# Altium PCB STM32_EVAL.PcbDoc
Units mm, origin at the board's own origin, x right, y up, seen from the top; angles counter-clockwise.
Board outline 152.4 x 101.6 mm, 6 copper layers (Top Layer 1, Layer 1, Top Layer, Bottom Layer, Layer 2, Bottom Layer 1), stack 0.816 mm thick; 88 components, 93 nets, 337 pads, 13 vias.
Unrouted connection lines stored in the file: 181.
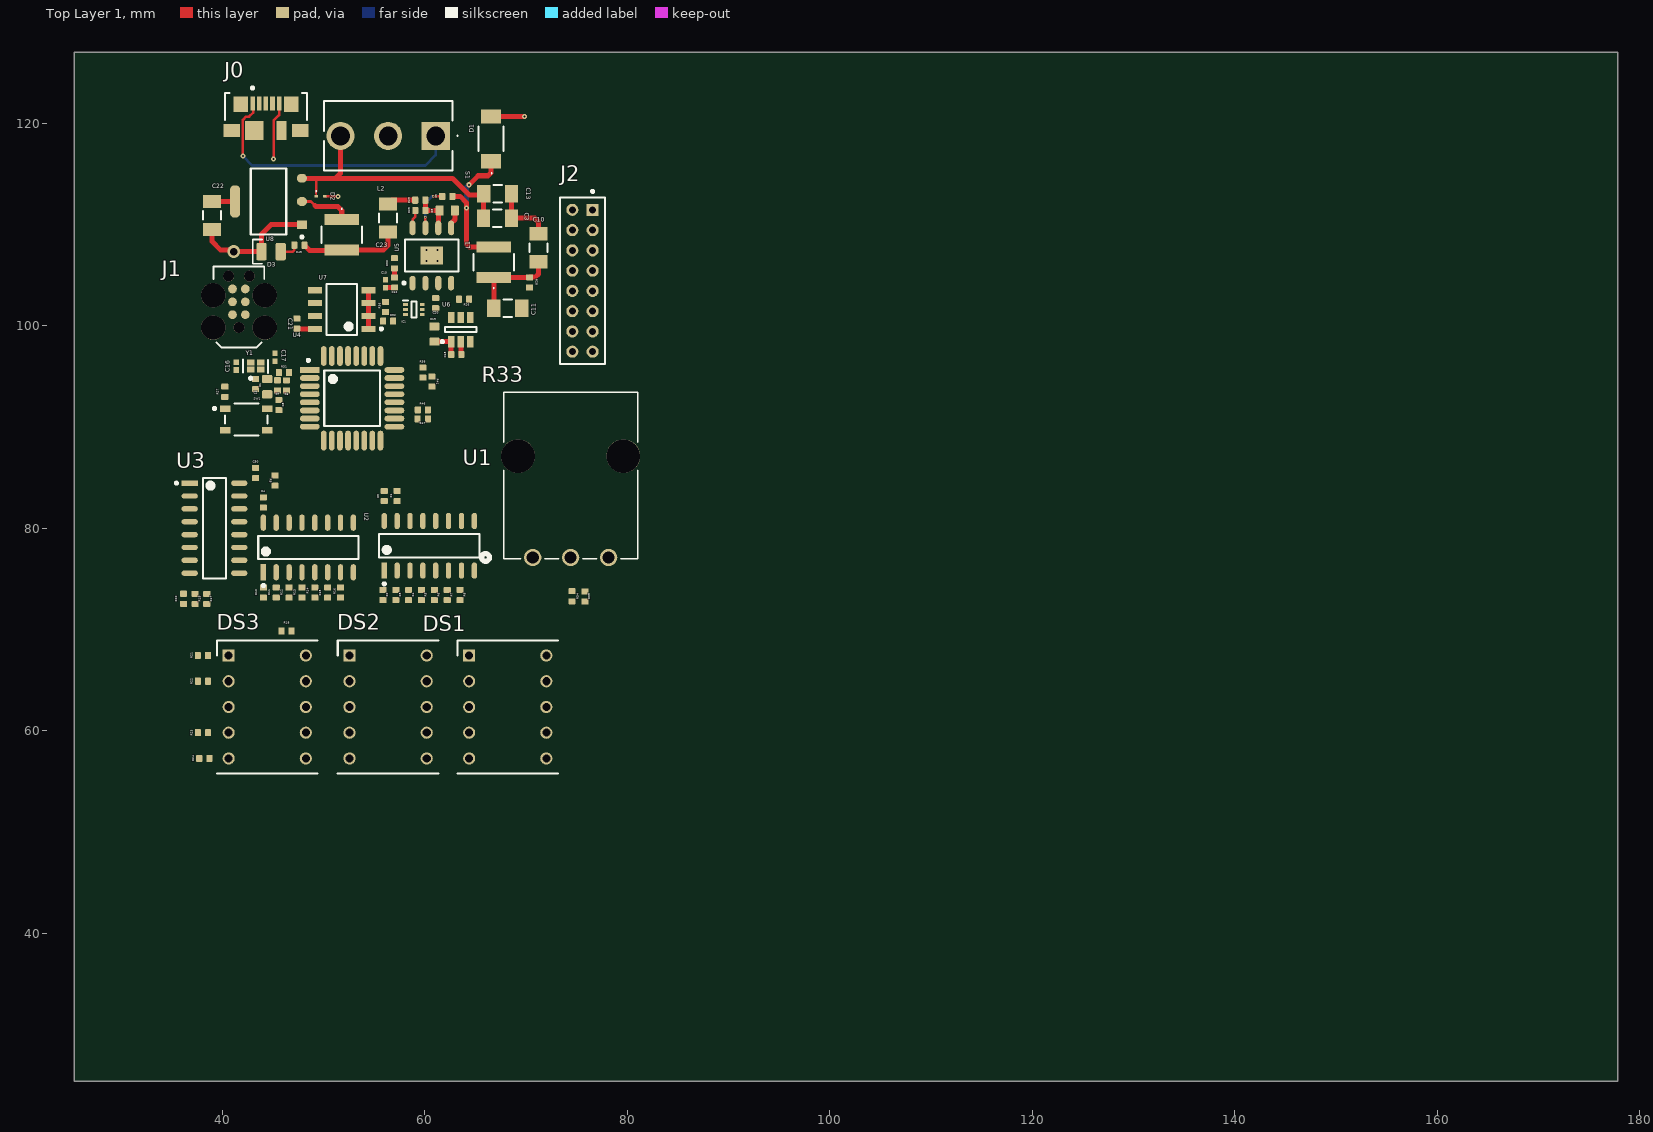
[diagram p0: Top Layer 1 view]
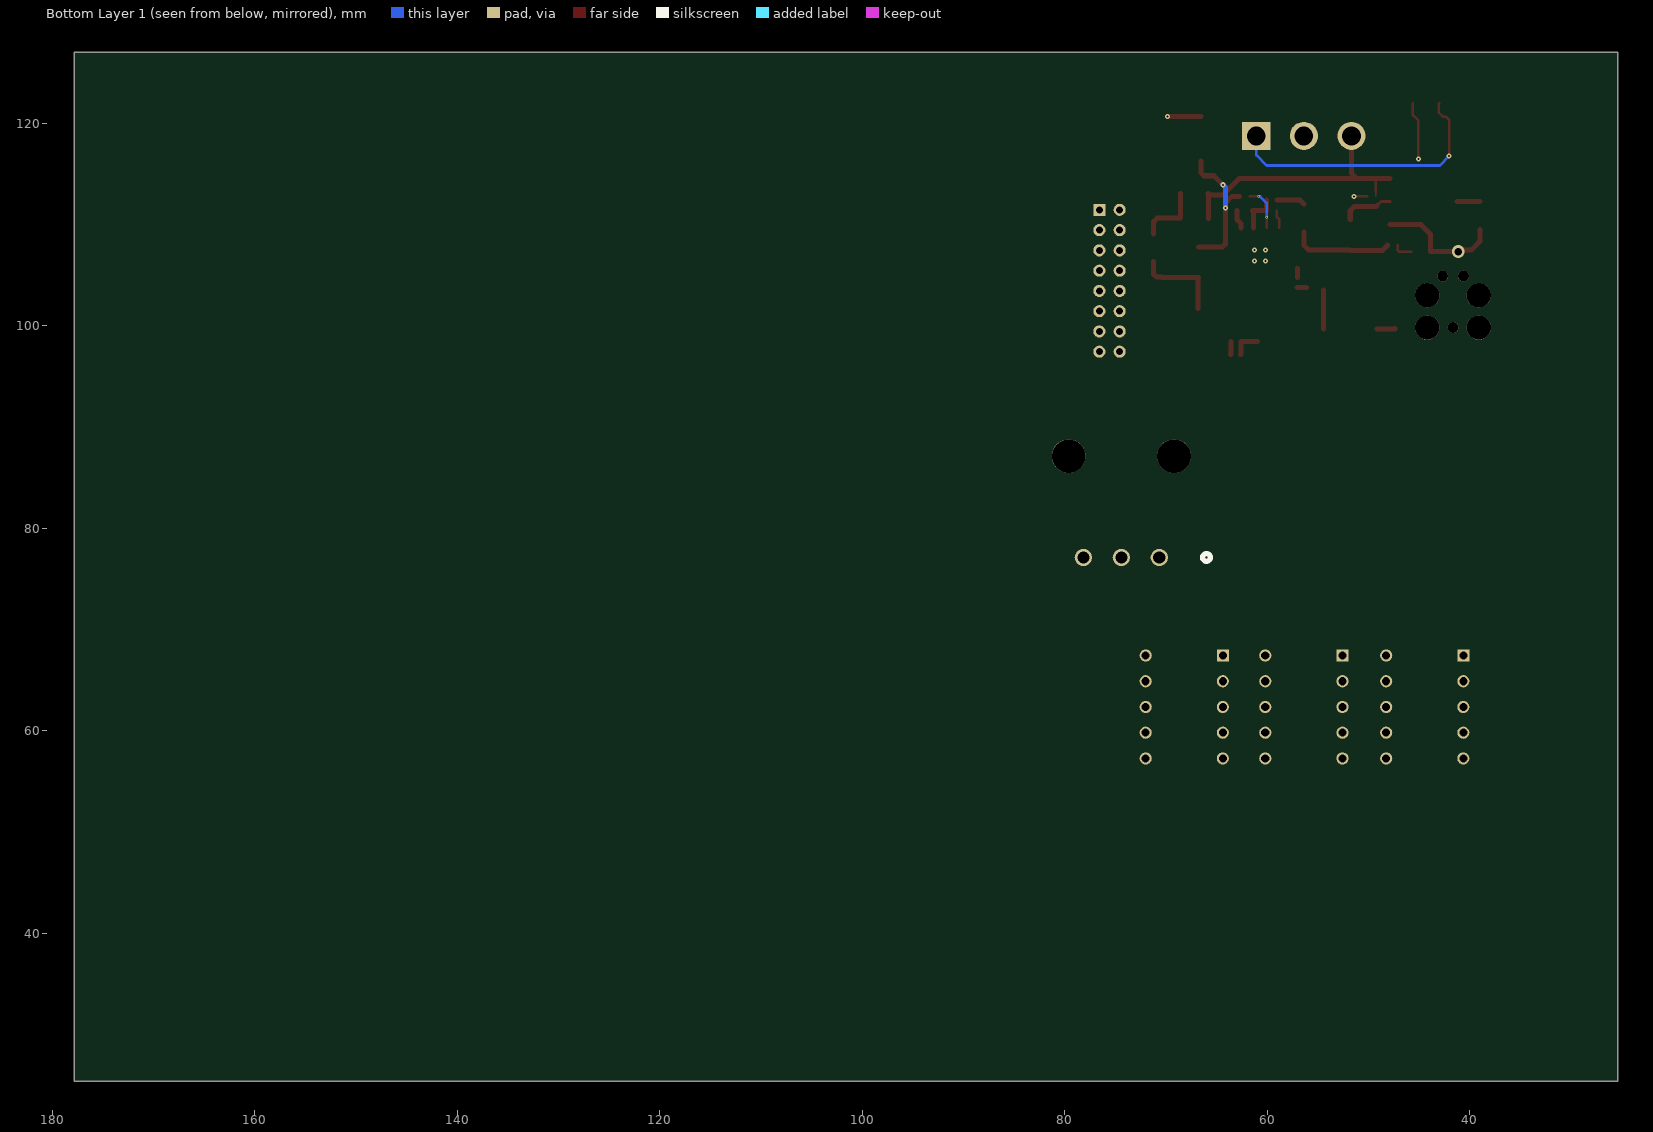
[diagram p1: Bottom Layer 1 view, seen from below]

## Layer stack, top to bottom
Top Solder: solder mask 0.0102, Solder Resist, Dk 3.5
Top Layer 1: signal copper 0.035
Dielectric 2: prepreg 0.0711, PP-006, Dk 4.1
Layer 1: signal copper 0.035
Dielectric 3: prepreg 0.0711, PP-006, Dk 4.1
Top Layer: signal copper 0.0356
Dielectric 1: dielectric 0.32, FR-4, Dk 4.8
Bottom Layer: signal copper 0.0356
Dielectric 4: prepreg 0.0711, PP-006, Dk 4.1
Layer 2: signal copper 0.035
Dielectric 5: prepreg 0.0711, PP-006, Dk 4.1
Bottom Layer 1: signal copper 0.035
Bottom Solder: solder mask 0.0102, Solder Resist, Dk 3.5

## Board outline
25.4,25.4 177.8,25.4 177.8,127 25.4,127

## Design rules (kind name [scope] priority, off if disabled: settings)
Clearance [All] p1: gap=0.102 ignorepadtopadclearanceinfootprint=TRUE except(0.152: SMDPad-SMDPad; 0.203: Arc-Via Track-Via SMDPad-Via THPad-Via Via-Via; 0.254: Arc-THPad Track-THPad SMDPad-THPad THPad-THPad)
Height [All] p1: minheight=0 maxheight=127 prefheight=12.7
HoleSize [All] p1: absolutevalues=TRUE maxlimit=50.8 minlimit=0.025 maxpercent=80.000 minpercent=20.000
HoleToHoleClearance [All] p1: gap=0.203 allowstackedmicrovias=TRUE
MinimumSolderMaskSliver [All] p1: minsoldermaskwidth=0.102
PasteMaskExpansion [All] p1: expansion=0.003
PolygonConnect [All] p1: connectstyle=Relief reliefconductorwidth=0.254 reliefentries=4 polygonreliefangle="90 Angle" airgapwidth=0.254
RoutingVias [All] p1: holewidth=0.152 width=0.254 viastyle="Through Hole" minholewidth=0.152 minwidth=0.254 maxholewidth=0.711 maxwidth=0.762
SilkToSilkClearance [All] p1: silktosilkclearance=0.102
SilkToSolderMaskClearance [IsPad] p1: minsilkscreentomaskgap=0.102 clearancetoexposedcopper=TRUE
SolderMaskExpansion [All] p1: expansion=0.004 istentingtop=FALSE
SupplyNets "Schematic Supply Nets_2" [InNet('GND')] p1: voltage=0.000
SupplyNets "Schematic Supply Nets_1" [InNet('+3V3')] p2: voltage=0.000
SupplyNets "Schematic Supply Nets" [InNet('5V_PTC')] p3: voltage=0.000
Width [All] p1: maxlimit=0.508 minlimit=0.102 preferedwidth=0.254 toplayer_prefwidth=0.127 midlayer1_minwidth=0.254 midlayer1_maxwidth=0.254 midlayer2_minwidth=0.254 midlayer2_maxwidth=0.254 midlayer3_minwidth=0.254 midlayer3_maxwidth=0.254 midlayer4_minwidth=0.254 midlayer4_maxwidth=0.254 bottomlayer_prefwidth=0.127 minimp=50.000000 maximp=50.000000 favimp=50.000000
23 further rules are at their usual default settings.

## Classes and differential pairs
component class S1: C3 C4 C50 DS1 DS2 DS3 R1 R2 R3 R4 R5 R6 R7 R8 R9 R10 R11 R12 R13 R14 R15 R16 R17 R18 R19 R20 R21 R22 R23 R24 U1 U2 U3
component class MCU_Build: C1 C2 C3 C5 C6 C7 C8 C9 C10 C11 C12 C13 C15 C16 C17 C18 C19 C20 C21 C22 C23 D1 D2 D3 IC1 J0 J1 J2 L1 L2 R25 R26 R27 R28 R29 R30 R31 R32 R33 R34 R35 R36 R38 R41 R45 R46 R47 S1 SW1 U4 U5 U6 U7 U8 Y1

## Components (designator, comment, footprint, x,y, rotation, side; value= is the part's Value field where it differs from the comment)
C1 "2.2u" CAP_0603 44.45,93.98 r90 top
C2 "100n" CAP_0402 43.307,94.234 r90 top
C3 "10u" FP-CL31-IPC_B 67.183,110.617 r0 top (schematic designator C14)
C3 "100n" CAP_0402 56.007,83.185 r90 top
C4 "100n" CAP_0402 44.069,82.55 r90 top
C5 "100n" CAP_0402 62.23,112.776 r0 top
C6 "100n" CAP_0402 46.355,94.107 r90 top
C7 "100n" CAP_0402 45.466,94.115 r90 top
C8 "100n" CAP_0402 45.594,92.165 r270 top
C9 "2.2u" CAP_0603 62.23,111.379 r180 top
C10 "10u" FP-CL31-IPC_B 71.247,107.696 r90 top
C11 "10u" FP-CL31-IPC_B 68.199,101.727 r0 top
C12 "100n" CAP_0402 57.023,104.267 r270 top
C13 "10u" FP-CL31-IPC_B 67.204,113.03 r0 top
C15 "8p" CAPC1005X55X25LL05T10 56.134,104.149 r270 top
C16 "8p" CAPC1005X55X25LL05T10 41.402,96.012 r270 top
C17 "8p" CAPC1005X55X25LL05T10 45.212,96.892 r270 top
C18 "100n" CAP_0402 63.119,97.155 r180 top
C19 "2.2u" CAP_0603 60.96,99.175 r270 top
C20 "100n" CAP_0402 61.087,102.227 r270 top
C21 "100n" CAP_0402 47.371,100.203 r270 top
C22 "2.2u" FP-CL31-IPC_B 38.989,110.892 r270 top
C23 "2.2u" FP-CL31-IPC_B 56.388,110.638 r90 top
C50 "100n" CAP_0402 43.307,85.463 r90 top
D1 "RBR5LAM60A" RF071LAM4S 66.548,118.45 r180 top
D2 "ESD9X5.0ST5G" ONSC-SOD-923-2-514AA-01_V 49.696,112.776 r0 top
D3 "GREEN" LED_0805_GREEN 44.831,107.315 r0 top
DS1 "LTS-4301JR" DIPS762W50P254L1290H725Q10N 64.389,67.437 r0 top
DS2 "LTS-4301JR" DIPS762W50P254L1290H725Q10N 52.578,67.437 r0 top
DS3 "LTS-4301JR" DIPS762W50P254L1290H725Q10N 40.64,67.437 r0 top
IC1 "TMP1075NDRLR" SOTFL50P160X60-6N 58.928,101.6 r0 top
J0 "473460001" FP-473460001-MFG 44.323,119.634 r0 top
J1 "TC2030" TC2030-FP 41.656,102.362 r90 top
J2 "79107-7007" FP-79107-7007-MFG 75.581,104.441 r270 top
L1 "15u" ASPI-4030S 66.802,106.275 r90 top
L2 "15u" ASPI-4030S 51.816,108.99 r270 top
R1 "330R" RES_0402 57.277,83.185 r270 top
R2 "330R" RES_0402 55.88,73.414 r90 top
R3 "330R" RES_0402 57.15,73.414 r90 top
R4 "330R" RES_0402 58.42,73.406 r90 top
R5 "330R" RES_0402 59.69,73.414 r90 top
R6 "330R" RES_0402 60.96,73.406 r90 top
R7 "330R" RES_0402 62.23,73.414 r90 top
R8 "330R" RES_0402 63.5,73.414 r90 top
R9 "330R" RES_0402 45.212,84.709 r270 top
R10 "330R" RES_0402 44.069,73.652 r270 top
R11 "330R" RES_0402 45.339,73.66 r270 top
R12 "330R" RES_0402 46.609,73.652 r90 top
R13 "330R" RES_0402 47.879,73.66 r270 top
R14 "330R" RES_0402 49.149,73.652 r90 top
R15 "330R" RES_0402 50.419,73.652 r270 top
R16 "330R" RES_0402 51.689,73.66 r270 top
R17 "330R" RES_0402 38.481,73.025 r90 top
R18 "330R" RES_0402 46.355,69.85 r180 top
R19 "330R" RES_0402 37.338,73.025 r90 top
R20 "330R" RES_0402 36.195,73.033 r270 top
R21 "330R" RES_0402 38.1,67.437 r0 top
R22 "330R" RES_0402 38.1,64.897 r180 top
R23 "330R" RES_0402 38.1,59.817 r180 top
R24 "330R" RES_0402 38.235,57.277 r180 top
R25 "120K" RES_0402 59.571,111.379 r180 top
R26 "10k" RES_0402 63.889,102.616 r0 top
R27 "10K" RES_0402 40.259,93.48 r90 top
R28 "100k" RES_0402 70.358,104.275 r90 top
R29 "80K" RES_0402 59.563,112.395 r0 top
R30 "4.7K" RES_0402 57.023,106.172 r270 top
R31 "0R" RES_0402 46.101,95.377 r0 top
R32 "10K" RES_0402 56.388,100.457 r0 top
R33 "P120PK-Y25BR10K" POT_P120PK-x25_TTE 70.665,77.122 r0 top
R34 "1k" RES_0402 74.549,73.287 r90 top
R35 "100k" RES_0402 75.819,73.271 r90 top
R36 "4.7k" RES_0402 56.134,101.854 r270 top
R38 "4.7k" RES_0402 59.817,95.369 r270 top
R41 "4.7k" RES_0402 60.706,94.48 r270 top
R45 "1k" RES_0402 47.625,107.95 r180 top
R46 "0R" RES_0402 59.817,91.694 r0 top
R47 "0R" RES_0402 59.809,90.805 r180 top
S1 "ANT11SF1CQE" ANT11SF1CQE 61.089,118.745 r90 top
SW1 "PTS810SJM250SMTRLFS" FP-PTS810SJM250SMTRLFS-MFG 42.389,90.744 r0 top
U1 "74HC595D,118" FP-SOT109-1-IPC_C 60.452,78.27 r90 top
U2 "74HC595D,118" FP-SOT109-1-IPC_C 48.514,78.105 r90 top
U3 "74HC595D,118" FP-SOT109-1-IPC_C 39.243,80.01 r0 top
U4 "STM32G030K8T6" FP-LQFP32-5V-IPC_A 52.832,92.837 r0 top
U5 "BD9G401EFJ-E2" SOIC127P600X100_HS-9N 60.706,106.934 r90 top
U6 "MCP4013T-502E/CH" SOT-23-CH6_N 63.566,99.625 r90 top
U7 "M24C02-WMN6TP" FP-SO8N-SO-A-MFG 51.816,101.6 r180 top
U8 "AMS1117-3.3" FP-AMS1117-IPC_C 44.577,112.268 r180 top
Y1 "ABM12W-40.0000MHZ-6-B1U-T3" FP-ABM12W-MFG 43.307,96.012 r0 top

## Footprints (in the part's own frame and the unit in brackets; to place one, negate y for a bottom-side part, rotate by r counter-clockwise, add the part's x,y. Pads: shape width x height; smd on the part's side, far side on the other; paste and mask are expansions set on the pad)
ANT11SF1CQE [mm]
  rect 2.775x2.775 hole 1.85: 1(0,0)
  round 2.775 hole 1.85: 2(0,4.7) 3(0,9.4)
  silkscreen extent -3.43,-2.2 3.43,11.05, body extent -3.43,-1.65 3.43,11.05, height 29.5
ASPI-4030S [mm]
  rect 1.1x3.4 smd: 1(-1.5,0) 2(1.5,0)
  silkscreen extent -2.6,-2 0.8,2, body extent -2,-2 2,2, height 3
CAP_0402 [mm]
  rrect25% 0.6x0.7 smd: 1(-0.5,0) 2(0.5,0)
  body extent -0.5,-0.26 0.5,0.26, height 0.37
CAP_0603 [mm]
  rrect25% 0.8x1 smd: 1(-0.75,0) 2(0.75,0)
  body extent -0.8,-0.4 0.8,0.4, height 0.51
CAPC1005X55X25LL05T10 [mm] "Chip Capacitor, 2-Leads, Body 1.00x0.50mm, IPC High Density"
  rect 0.56x0.52 smd: 1(-0.39,0) 2(0.39,0)
  body extent -0.53,-0.28 0.53,0.28, height 0.55
DIPS762W50P254L1290H725Q10N [mm]
  rect 1.2x1.2 hole 0.8: 1(0,0)
  round 1.2 hole 0.8: 2(0,-2.54) 3(0,-5.08) 4(0,-7.62) 5(0,-10.16) 6(7.62,-10.16) 7(7.62,-7.62) 8(7.62,-5.08) 9(7.62,-2.54) 10(7.62,0)
  silkscreen extent -1.16,-11.66 8.78,1.5, body extent -1.03,-11.53 8.67,1.37, height 8
FP-79107-7007-MFG [mm]
  rect 1.2x1.2 hole 0.7 paste-2539.97 mask+0: A1(-7,1)
  round 1.2 hole 0.7 paste-2539.97 mask+0: A2(-5,1) A3(-3,1) A4(-1,1) A5(1,1) A6(3,1) A7(5,1) A8(7,1) B1(-7,-1) B2(-5,-1) B3(-3,-1) B4(-1,-1) B5(1,-1) B6(3,-1) B7(5,-1) B8(7,-1)
  silkscreen extent -8.94,-2.22 8.22,2.22, body extent -8.32,-2.32 8.32,2.32, height 0.25
FP-473460001-MFG [mm]
  rect 0.45x1.38 smd paste+0 mask+0: 1(-1.3,2.31) 2(-0.65,2.31) 3(0,2.31) 4(0.65,2.31) 5(1.3,2.31)
  rect 1.425x1.55 smd paste+0 mask+0: 6(-2.488,2.225) 7(2.488,2.225)
  rect 1.65x1.3 smd paste+0 mask+0: 8(-3.375,-0.35) 11(3.375,-0.35)
  rect 1.8x1.9 smd paste+0 mask+0: 9(-1.15,-0.35)
  rect 1x1.9 smd paste+0 mask+0: 10(1.55,-0.35)
  silkscreen extent -4.05,0.67 4.05,3.97, body extent -4.3,-2.48 4.3,3.45, height 0.25
FP-ABM12W-MFG [mm]
  rect 0.73x0.58 smd paste+0 mask+0: 1(-0.5,-0.35) 2(0.5,-0.35) 3(0.5,0.35) 4(-0.5,0.35)
  silkscreen extent -1.25,-1.32 1.23,0.67, body extent -0.96,-0.75 0.96,0.75, height 0.25
FP-AMS1117-IPC_C [mm]
  rect 1.004x0.872 smd paste+0 mask+0: 1(-3.295,2.29)
  rrect100% 1.004x0.872 smd paste+0 mask+0: 2(-3.295,0) 3(-3.295,-2.29)
  rrect87% 1.004x3.182 smd paste+0 mask+0: 4(3.295,0)
  silkscreen extent -3.42,-3.25 1.75,3.62, body extent -3.9,-3.35 3.9,3.35, height 0.25
FP-CL31-IPC_B [mm]
  rect 1.305x1.758 smd paste+0 mask+0: 1(-1.376,0) 2(1.376,0)
  silkscreen extent -0.42,-0.88 0.42,0.88, body extent -1.6,-0.8 1.6,0.8, height 1.4
FP-LQFP32-5V-IPC_A [mm]
  rect 1.955x0.566 smd paste+0 mask+0: 1(-4.175,2.8)
  rrect100% 1.955x0.566 smd paste+0 mask+0: 2(-4.175,2) 3(-4.175,1.2) 4(-4.175,0.4) 5(-4.175,-0.4) 6(-4.175,-1.2) 7(-4.175,-2) 8(-4.175,-2.8) 17(4.175,-2.8) 18(4.175,-2) 19(4.175,-1.2) 20(4.175,-0.4) 21(4.175,0.4) 22(4.175,1.2) 23(4.175,2) 24(4.175,2.8)
  rrect100% 0.566x1.955 smd paste+0 mask+0: 9(-2.8,-4.175) 10(-2,-4.175) 11(-1.2,-4.175) 12(-0.4,-4.175) 13(0.4,-4.175) 14(1.2,-4.175) 15(2,-4.175) 16(2.8,-4.175) 25(2.8,4.175) 26(2,4.175) 27(1.2,4.175) 28(0.4,4.175) 29(-0.4,4.175) 30(-1.2,4.175) 31(-2,4.175) 32(-2.8,4.175)
  silkscreen extent -4.45,-2.75 2.75,3.87, body extent -5.65,-5.65 5.65,5.65, height 0.25
FP-PTS810SJM250SMTRLFS-MFG [mm]
  rect 1.05x0.65 smd paste+0 mask+0: 1(-2.075,1.075) 2(2.075,1.075) 3(-2.075,-1.075) 4(2.075,-1.075)
  silkscreen extent -3.27,-1.6 2.1,1.6, body extent -2.7,-1.7 2.7,1.7, height 0.25
FP-SO8N-SO-A-MFG [mm]
  rect 1.4x0.6 smd paste+0 mask+0: 1(-2.65,1.905) 2(-2.65,0.635) 3(-2.65,-0.635) 4(-2.65,-1.905) 5(2.65,-1.905) 6(2.65,-0.635) 7(2.65,0.635) 8(2.65,1.905)
  silkscreen extent -4.03,-2.5 1.5,2.5, body extent -3.45,-2.6 3.45,2.6, height 0.25
FP-SOT109-1-IPC_C [mm]
  rect 1.604x0.528 smd paste+0 mask+0: 1(-2.451,4.445)
  rrect100% 1.604x0.528 smd paste+0 mask+0: 2(-2.451,3.175) 3(-2.451,1.905) 4(-2.451,0.635) 5(-2.451,-0.635) 6(-2.451,-1.905) 7(-2.451,-3.175) 8(-2.451,-4.445) 9(2.451,-4.445) 10(2.451,-3.175) 11(2.451,-1.905) 12(2.451,-0.635) 13(2.451,0.635) 14(2.451,1.905) 15(2.451,3.175) 16(2.451,4.445)
  silkscreen extent -3.88,-4.95 1.15,4.95, body extent -3.35,-5.05 3.35,5.05, height 0.25
LED_0805_GREEN [mm]
  rrect25% 1x1.7 smd: A(0.95,0) K(-0.95,0)
  silkscreen extent -1.8,-1.2 -0.9,1.2, body extent -1,-0.63 1,0.63, height 1.12
ONSC-SOD-923-2-514AA-01_V [mm] "SOD, 2-Leads, Body 0.8x0.6mm"
  rect 0.36x0.25 smd: 1(-0.42,0) 2(0.42,0)
  silkscreen extent -0.47,0.48 -0.37,0.57, body extent -0.4,-0.3 0.4,0.3, height 0.43
POT_P120PK-x25_TTE [mil]
  round 67 / inner round 60 / far side round 67 hole 47 paste-99999 mask+0: 1(0,0) 2(147.64,0) 3(295.28,0)
  round 131 / inner round 60 / far side round 131 hole 131 unplated paste-99999 mask+0: 4(-57.09,393.7) 5(352.36,393.7)
  silkscreen extent -198,-15 409,643
RES_0402 [mm]
  rrect25% 0.6x0.7 smd: 1(-0.5,0) 2(0.5,0)
  body extent -0.5,-0.25 0.5,0.25, height 0.3
RF071LAM4S [mm]
  rect 2x1.4 smd: 1(0,2.2) 2(0,-2.2)
  silkscreen extent -1.25,-1.2 1.25,3.45, body extent -1.25,-2.35 1.25,2.35, height 0.95
SOIC127P600X100_HS-9N [mm] "SOIC, 8-Leads, Body 5.03x3.90mm, Pitch 1.27mm, Thermal Pad 2.20x1.80mm, IPC Medium Density"
  oval 1.45x0.6 smd: 1(-2.725,1.905) 2(-2.725,0.635) 3(-2.725,-0.635) 4(-2.725,-1.905) 5(2.725,-1.905) 6(2.725,-0.635) 7(2.725,0.635) 8(2.725,1.905)
  rect 1.8x2.2 smd: 2(0,0)
  silkscreen extent -2.85,-2.65 1.6,2.88, body extent -3,-2.65 3,2.65, height 1
SOT-23-CH6_N [mm] "SOT23, 6-Leads, Body 2.9x1.7mm, Pitch 0.95mm, Lead Span 2.8mm, IPC Medium Density"
  rect 1.1x0.65 smd: 1(-1.2,0.95) 2(-1.2,0) 3(-1.2,-0.95) 4(1.2,-0.95) 5(1.2,0) 6(1.2,0.95)
  silkscreen extent -1.32,-1.55 0.25,1.95, body extent -0.9,-1.55 0.9,1.55, height 1.45
SOTFL50P160X60-6N [mm]
  rect 0.475x0.3 smd: 1(-0.838,0.5) 2(-0.838,0) 3(-0.838,-0.5) 4(0.838,-0.5) 5(0.838,0) 6(0.838,0.5)
  silkscreen extent -1.07,-0.8 0.25,0.9, body extent -0.8,-0.8 0.8,0.8, height 0.6
TC2030-FP [mm]
  round 0.863 smd paste-0.432: 1(-1.27,-0.635) 2(-1.27,0.635) 3(0,-0.635) 4(0,0.635) 5(1.27,-0.635) 6(1.27,0.635)
  round 2.4 hole 2.4 unplated: MH(-2.54,-2.54) MH(-2.54,2.54) MH(0.635,2.54) MH(0.635,-2.54)
  round 1.067 hole 1.067 unplated: MH(-2.54,0) MH(2.54,-1.016) MH(2.54,1.016)
  silkscreen extent -4.5,-2.5 3.5,2.5

## Part data
C1 C9 C19: library part CAP_0603, "Capacitor SMD 0603"
C2 C3 C4 C5 C6 C7 C8 C12 C18 C20 C21 C50: library part CAP_0402, "Capacitor SMD 0402"
C3 C10 C11 C13 C22 C23: library part CMP-13271-003817-1, "Cap Ceramic 10uF 16V X7R ±10% SMD 1206 +125°C Embossed T/R", Capacitance=10uF, Case Code (Imperial)=1206, Case Code (Metric)=3216, Dielectric=X7R, Max Operating Temperature=125°C, Min Operating Temperature=-55°C, Package Quantity=1, Tolerance=10%, Voltage Rating=16V, Case/Package=1206, Depth=1.6mm, Height=1.6mm, Lead Free="Lead Free", Length=0.126inch, Mount="Surface Mount", Packaging="Tape and Reel", Radiation Hardening=No, Thickness=0.071inch, Width=0.063inch
C15 C16 C17: library part CMP-1034-00583-2, Manufacturer=Murata, Part Number=GRM1555C1H8R0BA01D
D1: "Schottky Diode", Manufacturer_Name="ROHM Semiconductor", Mouser Part Number=N/A, Datasheet Link=https://fscdn.rohm.com/en/products/databook/datasheet/discrete/diode/schottky_barrier/rbr5lam60atr-e.pdf, Height=0.95mm, Manufacturer_Part_Number=RBR5LAM60A, Mouser Price/Stock=https://www.mouser.co.uk/ProductDetail/ROHM-Semiconductor/RBR5LAM60A?qs=W0yvOO0ixfEqGw%252BcuKi1wQ%3D%3D
D2: library part CMP-1063-00108-1, "Transient Voltage Suppressor, Micro-Packaged Diode for ESD Protection, 2-Pin SOD-923, Pb-Free, Tape and Reel", Manufacturer="On Semiconductor", ComponentLink1Description="Manufacturer URL", ComponentLink1URL=http://www.onsemi.com/, ComponentLink2Description=Datasheet, ComponentLink2URL=http://www.onsemi.cn/pub_link/Collateral/ESD9X3.3ST5G-D.PDF, ComponentLink3Description="Package Specification", ComponentLink3URL=http://www.onsemi.com/pub_link/Collateral/514AA.PDF, DatasheetVersion="Rev. 7", Direction=Unidirectional, IR Max (uA)=1, Mounting Technology="Surface Mount", Number of Lines=1, PackageDescription="2-Pin SOD, Body 0.8 x 0.6 mm", PackageReference=SOD-923-2-514AA-01, PackageVersion="Rev. E, 03/2011", Packing="Tape and Reel", PartNumber=ESD9X5.0ST5G, RoHS=Pb-Free, V(BR) Min (V)=6.2, VRWM Max (V)=5
D3: library part LED_0805_GREEN, "LED 0805 GREEN SMD"
DS1 DS2 DS3: "Display", Manufacturer_Name=Lite-On, Mouser Part Number=859-LTS-4301JR, Arrow Part Number=LTS-4301JR, Arrow Price/Stock=https://www.arrow.com/en/products/lts-4301jr/lite-on-technology?utm_currency=USD&region=nac, Datasheet Link=https://optoelectronics.liteon.com/upload/download/DS30-2001-029/S4301JR.pdf, Height=7.25mm, Manufacturer_Part_Number=LTS-4301JR, Mouser Price/Stock=https://www.mouser.co.uk/ProductDetail/LITEON/LTS-4301JR?qs=GfyGBZdkxqkE3FENS0xvwg%3D%3D
IC1: "Integrated Circuit", Manufacturer_Name="Texas Instruments", Mouser Part Number=595-TMP1075NDRLR, Arrow Part Number=TMP1075NDRLR, Arrow Price/Stock=https://www.arrow.com/en/products/tmp1075ndrlr/texas-instruments?utm_currency=USD&region=nac, Datasheet Link=https://www.ti.com/lit/ds/symlink/tmp1075.pdf?ts=1637475227880&ref_url=https%253A%252F%252Fwww.ti.com%252Fstore%252Fti%252Fen%252Fp%252Fproduct%252F%253Fp%253DTMP1075NDRLR, Height=0.6mm, Manufacturer_Part_Number=TMP1075NDRLR, Mouser Price/Stock=https://www.mouser.co.uk/ProductDetail/Texas-Instruments/TMP1075NDRLR?qs=Wj%2FVkw3K%252BMAzhq67b4cIAg%3D%3D
J0: library part CMP-2000-05246-2, "CONN RCPT USB2.0 MICRO B SMD R/A", Current Rating=1.8A, Manufacturer=Molex, Package=0, Temperature="-30°C to +85°C", Temperature Range High=+85°C, Temperature Range Low=-30°C, Voltage Rating=30V, Automotive=No, Category=Conn, ComponentLink2Description=Datasheet, ComponentLink2URL=https://www.molex.com/webdocs/datasheets/pdf/en-us/0473460001_IO_CONNECTORS.pdf, Conn Orientation="Right Angle", Contact Material=Gold,Nickel, Device Class L1=Connectors, Device Class L2="USB Connectors", Device Class L3=unset, Digikey Description="CONN RCPT USB2.0 MICRO B SMD R/A", Footprint Url=https://www.molex.com/pdm_docs/sd/473460001_sd.pdf, Height=2.945mm, Is Female=yes, Lead Free=Yes, Manufacturer Part Number=473460001, Number Of Contacts=5, Octopart=https://octopart.com/47346-0001-molex-7164928, Pitch=0.65mm, RoHS=TRUE, Shielding=true, Usb Standard="USB 2.0"
J1: library part CMP-002-00074-1, "Tag-Connect No-Solder SWD Debug Connector DO NOT PLACE", Manufacturer=Tag-Connect, Design Item ID=TC2030, Manufacturer Part Number=TC2030, Source=Schematic-Lib-PhilsLab.SchLib
J2: library part CMP-00257-00277158-2, "79107-7007 Conn Socket Strip RCP 16 POS 2mm Solder ST Top Entry Thru-Hole Milli-Grid™ Tube", Contact Resistance=25mΩ, Current Rating=1A, Housing Color=Black, Manufacturer Lifecycle Status=ACTIVE, Max Operating Temperature=105°C, Max Voltage Rating (AC)=125V, Min Operating Temperature=-55°C, Contact Gender=Female, Contact Material="Bronze, Gold, Nickel", Contact Plating=Gold, Country of Origin=US, Gender=Receptacle, Glow Wire Compliant=Non-compliant, Height=4.69mm, Housing Material=Thermoplastic, Lead Free="Lead Free", Lead Pitch=2mm, Lifecycle Status=Production, Mount="Through Hole", NexarPartId=277158, Number of Circuits=16, Number Of Contacts=16, Number of Positions=16, Number of Rows=2, Orientation=Vertical, Pitch=2mm, Plating=Tin, Radiation Hardening=No, REACH SVHC=Unknown, RoHS=Compliant, Schedule B="8536694040, 8536694040", Termination="Through Hole", Voltage Rating=125V
L1 L2: library part ASPI-4030S-150M-T, "Inductor", Manufacturer_Name=ABRACON, Mouser Part Number=815-ASPI-4030S-150MT, Arrow Part Number=ASPI-4030S-150M-T, Arrow Price/Stock=https://www.arrow.com/en/products/aspi-4030s-150m-t/abracon?region=nac, Datasheet Link=https://abracon.com/Magnetics/power/ASPI-4030S.pdf, Height=3mm, Manufacturer_Part_Number=ASPI-4030S-150M-T, Mouser Price/Stock=https://www.mouser.co.uk/ProductDetail/ABRACON/ASPI-4030S-150M-T?qs=BLmuIjeT3qFL0%2Fp0zFI3Nw%3D%3D
R1 R2 R3 R4 R5 R6 R7 R8 R9 R10 R11 R12 R13 R14 R15 R16 R17 R18 R19 R20 R21 R22 R23 R24 R25 R26 R27 R28 R29 R30 R31 R32 R34 R35 R36 R38 R41 R45 R46 R47: library part RES_0402, "Resistor SMD 0402"
R33: "https://www.digikey.ca/en/products/detail/tt-electronics-bi/P120PK-Y25BR10K/5957454", Mfr_Name="TT Electronics"
S1: "Switch", Manufacturer_Name="CIT Relay & Switch", Datasheet Link=https://www.citrelay.com/CatalogPages/SwitchCatalog/ANT.pdf, Height=26.66mm, Manufacturer_Part_Number=ANT11SF1CQE
SW1: library part CMP-10040-000001-2, "SWITCH TACTILE SPST-NO 0.05A 16V", Case/Package=SMD/SMT, Color=Black, Current Rating=50mA, Max Operating Temperature=85°C, Min Operating Temperature=-40°C, Operating Force=160gf, Package Quantity=2900, Voltage Rating (DC)=16V, Actuator Type=Standard, Contact Plating=Silver, Depth=4.6mm, Illumination Type=Non-Illuminated, Lead Free="Lead Free", Length=3.2mm, Max Current Rating=50mA, Mechanical Life=150000Cycles, Mount="Surface Mount", Orientation=Straight, Packaging="Tape and Reel", RoHS Compliant=Yes, Switch Function=Off-Mom, Switch Travel=0.15mm, Termination=J-Bend, Throw Configuration=SPST
U1 U2 U3: library part CMP-14351-000006-1, "IC SHIFT REGISTER 8BIT 16SOIC", RoHS Compliant=Yes
U4: library part CMP-12105-000136-1, "IC MCU 32BIT 64KB FLASH 32LQFP", RoHS Compliant=Yes
U5: "BD9G401EFJ is buck converters with built-in high side / MOSFET. It has an input voltage range of 4.5V to 42V. / Current mode architecture provides fast transient / response and a simple phase compensation setup.", ComponentLink1Description="Manufactuer Link", ComponentLink1URL=https://www.digikey.ca/en/products/detail/rohm-semiconductor/BD9G401EFJ-E2/25927541, ComponentLink2Description="Data Sheet", ComponentLink2URL=https://fscdn.rohm.com/en/products/databook/datasheet/ic/power/switching_regulator/bd9g401efj-e.pdf
U6: library part CMP-0188-00742-2, "Low-Cost 64-Step Volatile Digital POT, 6-Pin SOT-23, Extended Temperature, Tape and Reel", Code_IPC=SOT26A-6, ComponentLink1Description="Manufacturer URL", ComponentLink1URL=http://www.microchip.com/, ComponentLink2Description=Datasheet, ComponentLink2URL=http://ww1.microchip.com/downloads/en/DeviceDoc/21978c.pdf, ComponentLink3Description="Package Specification", ComponentLink3URL=http://www.microchip.com/stellent/groups/techpub_sg/documents/packagingspec/en012702.pdf, DatasheetVersion="revC, Dec-2006", PackageDescription="6-Lead Plastic Small Outline Transistor (CH) [SOT-23]", PackageReference=SOT-23-CH6, PackageVersion="revBB, Aug-2009", RevisionNote="URLs added."
U7: library part CMP-2000-05370-2, "IC EEPROM 2K I2C 400KHZ 8SO", Ambient Temperature Range High=+85°C, Ambient Temperature Range Low=-40°C, Frequency=400kHz, Manufacturer=STMicroelectronics, Max Supply Voltage=5.5V, Min Supply Voltage=2.5V, Nominal Supply Current=0.5-1mA, Package=SO8N-SO-A, Temperature="-40°C to +85°C", Access Time=900ns, Automotive=No, Category=IC, ComponentLink2Description=Datasheet, ComponentLink2URL=https://www.st.com/resource/en/datasheet/m24c02-w.pdf, Device Class L1="Integrated Circuits (ICs)", Device Class L2=Memory, Device Class L3=EEPROM, Digikey Description="IC EEPROM 2K I2C 400KHZ 8SO", Height=1.75mm, Interface=I2C, Lead Free=Yes, Manufacturer Part Number=M24C02-WMN6TP, Memory Size=2Kbits, Memory Type=EEPROM, Mouser Description="M24C02 Series 2 Kb (256 x 8) 2.5 V SMT Serial I²C Bus EEPROM - SOIC-8", Octopart=https://octopart.com/m24c02-wmn6tp-stmicroelectronics-55404516, RoHS=TRUE, Standoff Height=0.1mm, Temperature Range High=+85°C, Temperature Range Low=-40°C
U8: library part CMP-209535-000001-1, "LDO Voltage Regulators 1A, 3.3V", Dropout Voltage=1.1V, Manufacturer="Advanced Monolithic Systems", Max Junction Temp=+125°C, Max Power Dissipation=1.2W, Max Supply Voltage=15V, Nominal Supply Current=5mA, Output Current=1A, Output Voltage=3.3V, Package=AMS1117, Temperature="-40°C to +125°C", Temperature Range Low=-40°C, Automotive=No, Category=IC, ComponentLink2Description=Datasheet, ComponentLink2URL=http://www.advanced-monolithic.com/pdf/ds1117.pdf, Device Class L1="Integrated Circuits (ICs)", Device Class L2="Power Management ICs", Device Class L3="Voltage Regulators - Linear", Height=1.8mm, Ipc Land Pattern Name=SOT229P700X180-4, Lead Free=Yes, Manufacturer Part Number=AMS1117-3.3, Number Of Outputs=1, Octopart=https://octopart.com/ams1117-3.3-advanced+monolithic+systems-25899300, Output Type=Fixed, RoHS=TRUE, Standoff Height=0.64mm, Temperature Range High=+125°C
Y1: library part CMP-27762-007054-1, "Crystal 40MHz ±10ppm 6pF SMD-4 1.6mm x 1.2mm"

## Via types
v1: diameter 0.5, hole 0.2, Top Layer 1 to Bottom Layer 1, 10 vias
v2: diameter 0.254, hole 0.152, Top Layer 1 to Bottom Layer 1, 2 vias
v3: diameter 1.27, hole 0.711, Top Layer 1 to Bottom Layer 1, 1 vias

## Nets (pads, with @x,y where several pads share a name; then routed paths per layer and width w, separated by ;. In a path a pad name is that pad's centre, name@x,y a point inside that pad or via, vN(x,y) a via of type N, cw(c..) or ccw(c..) an arc to the next point about the centre after c; other vN are vias at no path point)
3V3_LED_A: D3.A R45.2 | length 1.9
  Top Layer 1 w0.127: R45.2@47.117,107.942 R45.2
  Top Layer 1 w0.254: D3.A 46.99,107.315 47.117,107.442 R45.2@47.117,107.942
5V_PTC: C3.1 C4.1 C13.1 C50.1 D2.1 R25.2 R33.1 S1.3 U1.16 U2.16 U3.16 U5.8 U8.3 | length 29.1
  Top Layer 1 w0.127: D2.1 49.276,113.03 ; R25.2@59.055,111.363 R25.2
  Top Layer 1 w0.191: 49.276,113.03 49.276,113.284
  Top Layer 1 w0.254: 49.276,113.284 49.276,114.554 ; U5.8 58.801,110.49 59.055,110.744 R25.2@59.055,111.363
  Top Layer 1 w0.5: U8.3 47.876,114.554 48.514,114.554
  Top Layer 1 w0.508: 48.514,114.554 49.276,114.554 51.181,114.554 ; S1.3 51.689,115.062 51.181,114.554 ; C3.1@65.807,110.617 65.817,110.627 65.817,113.02 C13.1 65.7,112.903 64.389,112.903 62.738,114.554 51.181,114.554
+3V3: C1.2 C2.2 C6.2 C7.2 C18.2 C19.2 C20.2 C21.2 C23.1 IC1.5 J1.1 L2.2 R27.2 R36.1 R38.1 R41.1 R45.1 U4.4 U6.1 U7.8 | length 14.7
  Top Layer 1 w0.5: C21.2 47.375,99.699 49.162,99.699 U7.8 ; R45.1 48.125,107.9 48.175,107.85 48.225,107.85 48.633,107.442 51.768,107.442 L2.2 55.928,107.49 56.388,107.95 C23.1 ; C19.2 U6.1 62.617,98.424 62.617,97.156 C18.2
+5V: J0.1 S1.1 | length 27.6
  Top Layer 1 w0.254: v1(42.037,116.743) 42.037,120.023 42.044,120.031 42.044,120.329 42.366,120.65 42.672,120.65 43.053,121.031 43.053,121.914 J0.1
  Bottom Layer 1 w0.254: v1(42.037,116.743) 42.956,115.824 60.071,115.824 61.089,116.842 S1.1
ADC_MCU_IN: J2.B3 U4.8
ADC_POT_INPUT: R33.2 R34.2 R35.2 U4.7
BUCK_BST: C5.1 U5.7 | length 4.4
  Top Layer 1 w0.254: U5.7 v2(60.071,110.699) ; v2(60.833,112.776) C5.1
  Bottom Layer 1 w0.254: v2(60.071,110.699) 60.071,112.141 60.706,112.776 v2(60.833,112.776)
BUCK_EN: C9.2 R25.1 R29.2 U5.6 | length 4.2
  Top Layer 1 w0.5: R29.2 60.067,112.391 60.067,111.383 R25.1 C9.2 61.36,111.259 61.36,109.678 U5.6
BUCK_FB: R26.1 U5.4 U6.5
BUCK_OUT: C5.2 D1.1 L1.2 U5.1 | length 14.7
  Top Layer 1 w0.5: C5.2 63.5,112.776 64.135,112.141 v1(64.135,111.633) 64.135,108.077 64.437,107.775 L1.2 ; v1(64.389,113.919) 65.278,114.808 66.255,114.808 66.548,115.101 D1.1
  Bottom Layer 1 w0.5: v1(64.135,111.633) 64.135,113.665 v1(64.389,113.919)
BUCK_POT_CS: U4.20 U6.4
BUCK_POT_UD: U4.11 U6.3
BUCK_VC: C12.2 C15.2 U5.3 | length 0.9
  Top Layer 1 w0.5: C15.2 57.043,103.76 C12.2@57.05,103.767
CAP_VC_RES: C12.1 R30.2 | length 0.9
  Top Layer 1 w0.5: C12.1 R30.2
EE_WRITE_PTC: U4.26 U7.7
GND: C1.1 C2.1 C3.2 C4.2 C6.1 C7.1 C8.1 C9.1 C10.2 C11.2 C13.2 C15.1 C16.1 C17.1 C18.1 C19.1 C20.1 C21.1 C22.2 C23.2 C50.2 D1.2 D2.2 D3.K DS1.3 DS1.8 DS2.3 DS2.8 DS3.3 DS3.8 IC1.2 IC1.4 J0.5 J1.5 R28.1 R29.1 R30.1 R32.2 R34.1 R35.1 SW1.3 SW1.4 U1.8 U1.13 U2.8 U2.13 U3.8 U3.13 U4.5 U5.2 U5.5 U6.2 U7.1 U7.2 U7.3 U7.4 U8.1 Y1.2 Y1.4 | length 39.2
  Top Layer 1 w0.254: v1(45.085,116.459) 45.085,120.269 45.384,120.568 45.623,120.807 J0.5 ; D2.2 v1(51.435,112.776)
  Top Layer 1 w0.5: C22.2 38.989,108.331 39.858,107.462 41.001,107.462 v3(41.148,107.315) D3.K 43.881,109.032 44.831,109.982 47.868,109.982 U8.1 ; U7.1 U7.4 ; C23.2 56.769,112.395 R29.1 ; U5.5 62.611,110.111 62.992,110.492 62.992,111.367 C9.1 ; U6.2 63.593,98.399 63.593,97.181 C18.1 ; D1.2 v1(69.85,120.65) ; C13.2 68.57,113.02 68.57,110.627 68.559,110.617 70.866,110.617 71.247,110.236 C10.2
  other v1: 60.156,106.384 61.256,106.384 60.156,107.484 61.256,107.484
GPIO_1: J2.B4 U4.28
GPIO_2: J2.A6 U4.29
GPIO_3: J2.A7 U4.30
GPIO_4: J2.A8 U4.10
GPIO_5: J2.B1 U4.31
GPIO_6: J2.B2 U4.32
HEX1_DATA_IN: U1.14 U4.15
HEX1_OUT_Q0: DS1.6 R1.1
HEX1_OUT_Q1: DS1.10 R2.1
HEX1_OUT_Q2: DS1.9 R3.1
HEX1_OUT_Q3: DS1.7 R4.1
HEX1_OUT_Q4: DS1.1 R5.1
HEX1_OUT_Q5: DS1.2 R6.1
HEX1_OUT_Q6: DS1.4 R7.1
HEX1_OUT_Q7: DS1.5 R8.1
HEX2_DATA_IN: U2.14 U4.16
HEX2_OUT_Q0: DS2.6 R9.1
HEX2_OUT_Q1: DS2.10 R10.1
HEX2_OUT_Q2: DS2.9 R11.1
HEX2_OUT_Q3: DS2.7 R12.1
HEX2_OUT_Q4: DS2.1 R13.1
HEX2_OUT_Q5: DS2.2 R14.1
HEX2_OUT_Q6: DS2.4 R15.1
HEX2_OUT_Q7: DS2.5 R16.1
HEX3_DATA_IN: U3.14 U4.17
HEX3_OUT_Q0: DS3.6 R17.1
HEX3_OUT_Q1: DS3.10 R18.1
HEX3_OUT_Q2: DS3.9 R19.1
HEX3_OUT_Q3: DS3.7 R20.1
HEX3_OUT_Q4: DS3.1 R21.1
HEX3_OUT_Q5: DS3.2 R22.1
HEX3_OUT_Q6: DS3.4 R23.1
HEX3_OUT_Q7: DS3.5 R24.1
I2C_SCL: IC1.1 R41.2 U4.22 U7.6
I2C_SDA: IC1.6 R38.2 U4.23 U7.5
LDO_3V3_OUT: C22.1 L2.1 U8.2 U8.4 | length 7.5
  Top Layer 1 w0.254: U8.2 48.768,112.268 49.149,111.887
  Top Layer 1 w0.5: 49.149,111.887 49.276,111.76 51.435,111.76 51.816,111.379
  Top Layer 1 w0.508: C22.1 U8.4 ; L2.1 51.816,111.379
MCU_BOOT0/SWCLK: J1.4 R32.1 U4.25
MCU_CLK_OUT: J2.B5 U4.27
MCU_OSC_IN: C17.2 U4.2 Y1.3
MCU_OSC_OUT: R31.2 U4.3
MCU_RST: C8.2 J1.3 R27.1 SW1.1 SW1.2 U4.6
MCU_SWDIO: J1.2 U4.24
R_BCK_LOAD: C10.1 C11.1 L1.1 R26.2 R28.2 | length 8.8
  Top Layer 1 w0.5: C11.1 66.823,104.754 L1.1 R28.2 70.408,104.825 70.954,104.825 71.247,105.118 C10.1
RCC_LSCO/GPIO: J2.A1 U4.9
RCC_MCO/GPIO: J2.A2 R46.1 U4.19
SHFT_CLK: R46.2 R47.1 U1.11 U1.12 U2.11 U2.12 U3.11 U3.12
SHFT_CLK_MCU: R47.2 U4.18
SHFT_HEX1_Q0: R1.2 U1.15
SHFT_HEX1_Q1: R2.2 U1.1
SHFT_HEX1_Q2: R3.2 U1.2
SHFT_HEX1_Q3: R4.2 U1.3
SHFT_HEX1_Q4: R5.2 U1.4
SHFT_HEX1_Q5: R6.2 U1.5
SHFT_HEX1_Q6: R7.2 U1.6
SHFT_HEX1_Q7: R8.2 U1.7
SHFT_HEX2_Q0: R9.2 U2.15
SHFT_HEX2_Q1: R10.2 U2.1
SHFT_HEX2_Q2: R11.2 U2.2
SHFT_HEX2_Q3: R12.2 U2.3
SHFT_HEX2_Q4: R13.2 U2.4
SHFT_HEX2_Q5: R14.2 U2.5
SHFT_HEX2_Q6: R15.2 U2.6
SHFT_HEX2_Q7: R16.2 U2.7
SHFT_HEX3_Q0: R17.2 U3.15
SHFT_HEX3_Q1: R18.2 U3.1
SHFT_HEX3_Q2: R19.2 U3.2
SHFT_HEX3_Q3: R20.2 U3.3
SHFT_HEX3_Q4: R21.2 U3.4
SHFT_HEX3_Q5: R22.2 U3.5
SHFT_HEX3_Q6: R23.2 U3.6
SHFT_HEX3_Q7: R24.2 U3.7
SHFT_RST: U1.10 U2.10 U3.10 U4.1
SPI_MISO: J2.A4 U4.13
SPI_MOSI: J2.A5 U4.14
SPI_SCK: J2.A3 U4.12
TMP_ALERT: IC1.3 R36.2 U4.21
Xtal_IN: C16.2 R31.1 Y1.1
pads on no net: J0.2 J0.3 J0.4 J0.6 J0.7 J0.8 J0.9 J0.10 J0.11 J1.6 J1.MH J2.B6 J2.B7 J2.B8 R33.3 R33.4 R33.5 S1.2 U1.9 U2.9 U3.9 U6.6

## Text inside footprints (layer, text, board x,y; h text height)
D3: Mechanical 13 "+" at 46.598,108.315 h1